# EAGLE board Microcontroller Board 1.6 (EAGLE 7.2.0)
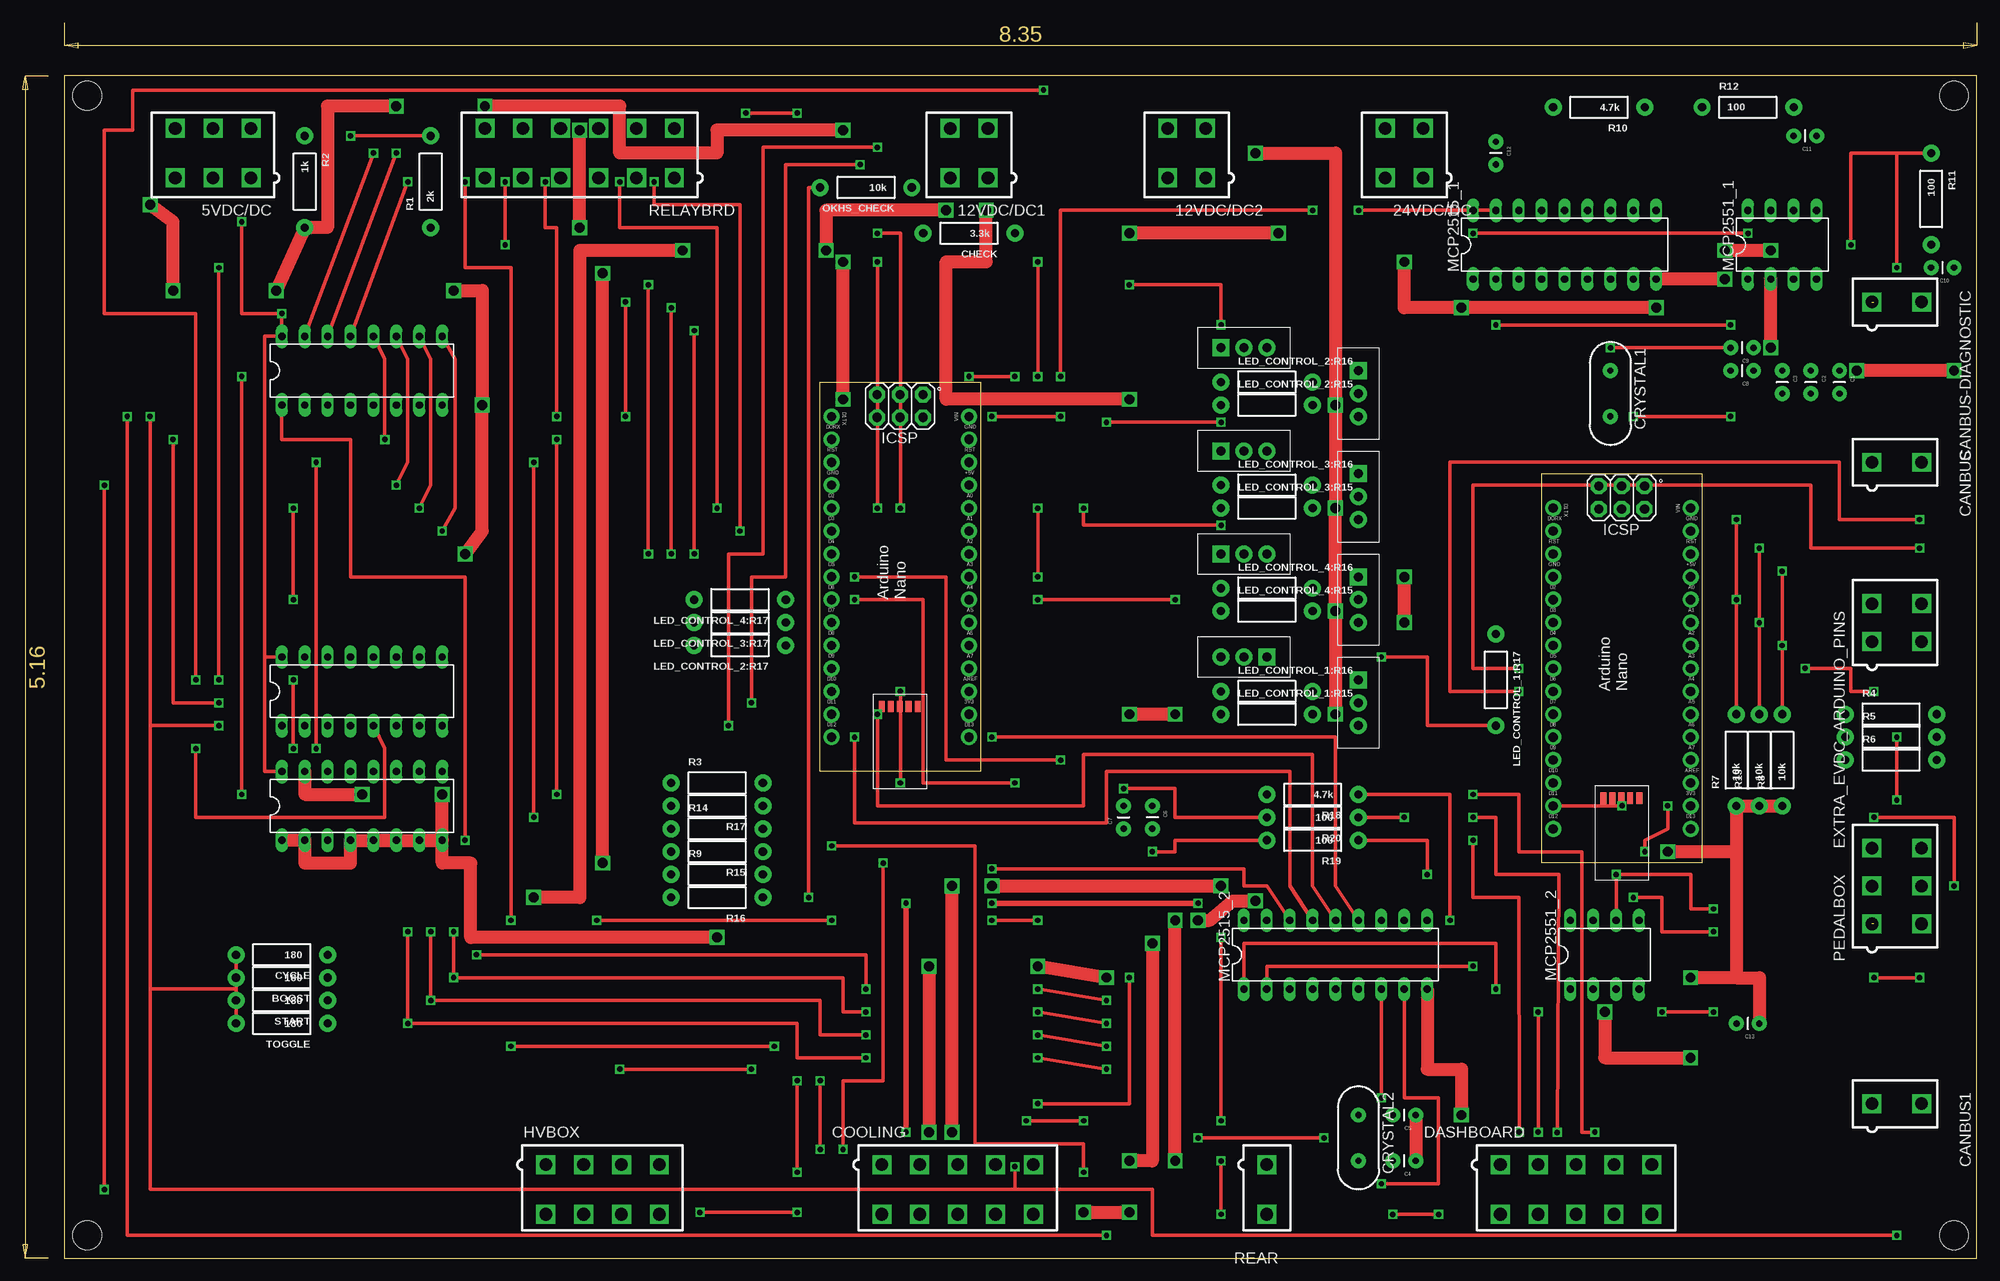
[diagram p0: board, top side]
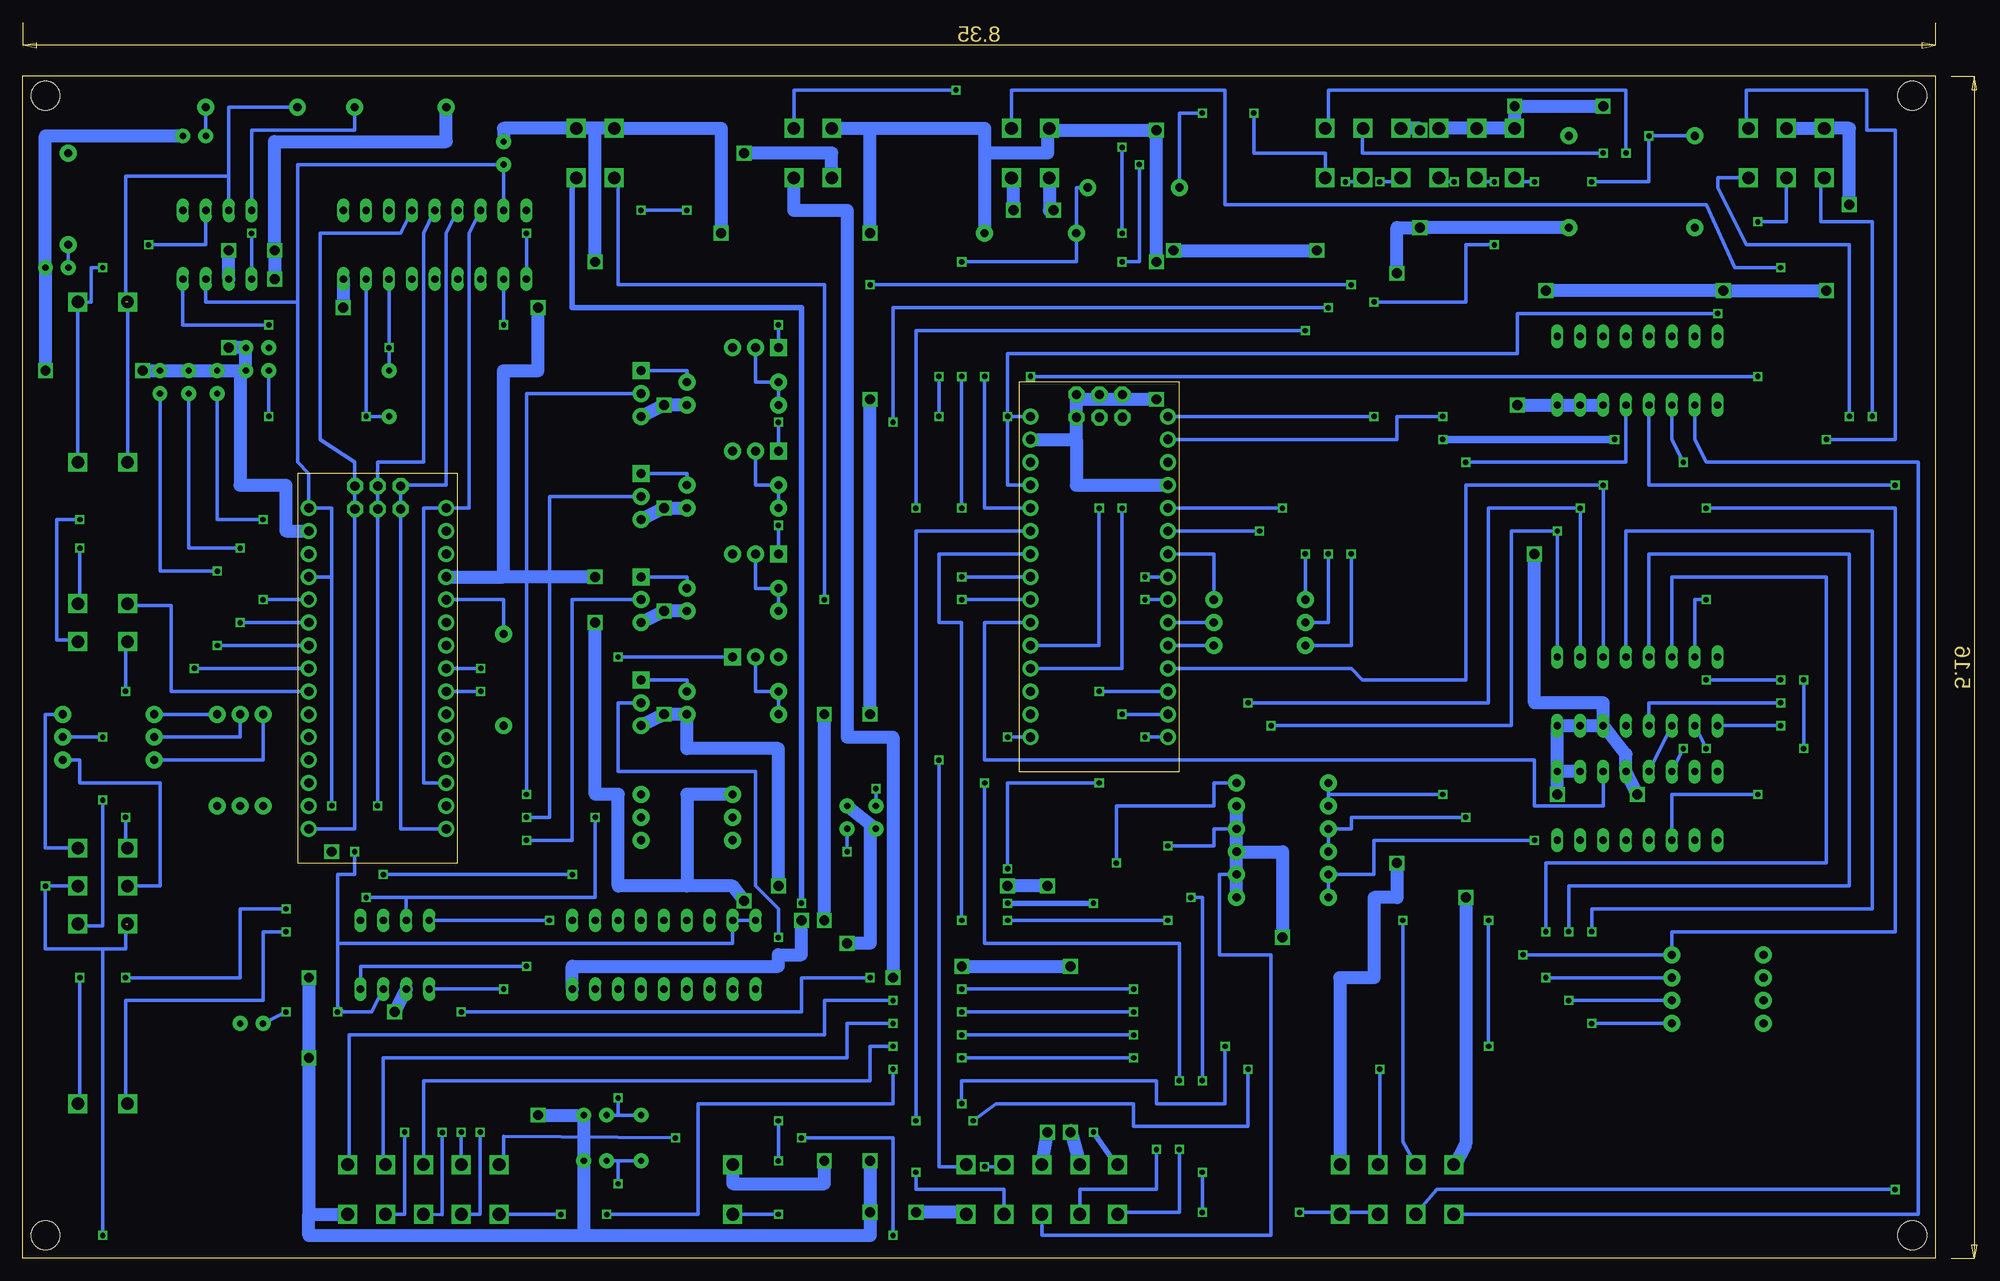
[diagram p1: board, bottom side, seen from below]

Size 212.07 x 131.12 mm. Coordinates in mm from the lower left corner, seen from the top.
Outline: 0,0 212.07,0 212.07,131.12 0,131.12 0,0
Copper layers (1*16): Top 0.035mm / dielectric 1.5mm / Bottom 0.035mm
Design rules "default": minimum track width 10mil, minimum drill 24mil, track to track 8mil, track to pad 8mil, pad to pad 8mil, via to via 8mil, smd to smd 8mil, copper to edge 40mil, drill to drill 8mil, minimum pad ring 10mil, minimum via ring 8mil, stop-mask expansion 4mil, vias tented up to drill 0mil, thermal gap 10mil
Holes 3.2 mm at 2.54,128.91 2.54,2.54 209.55,128.91 209.55,2.54

## Footprints (pad centres in the part's own frame; a part is rotated, then mirrored left to right if it is on the bottom)
5566-6 = drill 1.4 square: 1 4.2,-2.75; 2 0,-2.75; 3 -4.2,-2.75; 4 4.2,2.75; 5 0,2.75; 6 -4.2,2.75
5566-4 = drill 1.4 square: 1 2.1,-2.75; 2 -2.1,-2.75; 3 2.1,2.75; 4 -2.1,2.75
DIL16 = drill 0.813 long: 1 -8.89,-3.81; 2 -6.35,-3.81; 3 -3.81,-3.81; 4 -1.27,-3.81; 5 1.27,-3.81; 6 3.81,-3.81; 7 6.35,-3.81; 8 8.89,-3.81; 9 8.89,3.81; 10 6.35,3.81; 11 3.81,3.81; 12 1.27,3.81; 13 -1.27,3.81; 14 -3.81,3.81; 15 -6.35,3.81; 16 -8.89,3.81
AXIAL-0.4 = drill 0.9 pad 1.88: P$1 -5.08,0; P$2 5.08,0
CAP-PTH-SMALL = drill 0.7 pad 1.651: 1 0,0; 2 2.54,0
5566-2 = drill 1.4 square: 1 0,-2.75; 2 0,2.75
5566-10 = drill 1.4 square: 1 8.4,-2.75; 2 4.2,-2.75; 3 0,-2.75; 4 -4.2,-2.75; 5 -8.4,-2.75; 6 8.4,2.75; 7 4.2,2.75; 8 0,2.75; 9 -4.2,2.75; 10 -8.4,2.75
HC49US = drill 0.7 pad 1.651: 1 -2.54,0; 2 2.54,0
5566-8 = drill 1.4 square: 1 6.3,-2.75; 2 2.1,-2.75; 3 -2.1,-2.75; 4 -6.3,-2.75; 5 6.3,2.75; 6 2.1,2.75; 7 -2.1,2.75; 8 -6.3,2.75
TO-220 = drill 1 pad 1.88 square: 1 -2.54,0 | drill 1 pad 1.88: 2 0,0; 3 2.54,0
DIL18 = drill 0.813 long: 1 -10.16,-3.81; 2 -7.62,-3.81; 3 -5.08,-3.81; 4 -2.54,-3.81; 5 0,-3.81; 6 2.54,-3.81; 7 5.08,-3.81; 8 7.62,-3.81; 9 10.16,-3.81; 10 10.16,3.81; 11 7.62,3.81; 12 5.08,3.81; 13 2.54,3.81; 14 0,3.81; 15 -2.54,3.81; 16 -5.08,3.81; 17 -7.62,3.81; 18 -10.16,3.81
DIL08 = drill 0.813 long: 1 -3.81,-3.81; 2 -1.27,-3.81; 3 1.27,-3.81; 4 3.81,-3.81; 5 3.81,3.81; 6 1.27,3.81; 7 -1.27,3.81; 8 -3.81,3.81
ARDUINO_NANO = drill 1.016 pad 1.778: 3V3 6.35,1.27; 5V 31.75,1.27; A0 29.21,1.27; A1 26.67,1.27; A2 24.13,1.27; A3 21.59,1.27; A4 19.05,1.27; A5 16.51,1.27; A6 13.97,1.27; A7 11.43,1.27; D2 29.21,16.51; D3 26.67,16.51; D4 24.13,16.51; D5 21.59,16.51; D6 19.05,16.51; D7 16.51,16.51; D8 13.97,16.51; D9 11.43,16.51; D10 8.89,16.51; D11 6.35,16.51; D12 3.81,16.51; D13 3.81,1.27; GND 31.75,16.51; GND. 36.83,1.27; REF 8.89,1.27; RST 34.29,16.51; RST. 34.29,1.27; RX1 36.83,16.51; TX1 39.37,16.51; VIN 39.37,1.27 | drill 1.016 pad 1.778 octagon: 5V. 39.268,6.375; GND_ 39.268,11.455; MISO 41.808,6.375; MOSI 39.268,8.915; RESET.. 41.808,11.455; SCK 41.808,8.915 | smd 1.27 x 0.635: <USB>+V 7.214,10.947; <USB>D+ 7.214,9.957; <USB>D- 7.214,8.941; <USB>GND 7.214,6.96; <USB>ID 7.214,7.976
5566-12 = drill 1.4 square: 1 10.5,-2.75; 2 6.3,-2.75; 3 2.1,-2.75; 4 -2.1,-2.75; 5 -6.3,-2.75; 6 -10.5,-2.75; 7 10.5,2.75; 8 6.3,2.75; 9 2.1,2.75; 10 -2.1,2.75; 11 -6.3,2.75; 12 -10.5,2.75

## Placement (x,y rotation side)
5VDC/DC  5566-6  [5566-6]  16.51,122.56 0 top
12VDC/DC1  5566-4  [5566-4]  100.33,122.56 0 top
12VDC/DC2  5566-4  [5566-4]  124.46,122.56 0 top
16_CHANNEL_MULTIPLEXER:MULTIPLEXER_1  CD74HC4051E  [DIL16]  33.02,50.17 0 top
16_CHANNEL_MULTIPLEXER:MULTIPLEXER_2  CD74HC4051E  [DIL16]  33.02,62.86 0 top
16_CHANNEL_MULTIPLEXER:MULTIPLEXER_3  CD74HC4051E  [DIL16]  33.02,98.42 0 top
24VDC/DC  5566-4  [5566-4]  148.59,122.56 0 top
BOOST  180  [AXIAL-0.4]  24.13,31.11 180 top
C1  [CAP-PTH-SMALL]  196.85,98.42 270 top
C2  [CAP-PTH-SMALL]  193.68,98.42 270 top
C3  [CAP-PTH-SMALL]  190.5,98.42 270 top
C4  22pF  [CAP-PTH-SMALL]  149.86,10.79 180 top
C5  22pF  [CAP-PTH-SMALL]  149.86,15.88 180 top
C6  560pF  [CAP-PTH-SMALL]  120.65,50.17 270 top
C7  560pF  [CAP-PTH-SMALL]  117.47,47.62 90 top
C8  22pF  [CAP-PTH-SMALL]  187.32,98.42 180 top
C9  22pF  [CAP-PTH-SMALL]  187.32,100.97 180 top
C10  560pF  [CAP-PTH-SMALL]  209.55,109.86 180 top
C11  560pF  [CAP-PTH-SMALL]  194.31,124.46 180 top
C12  0.1uF  [CAP-PTH-SMALL]  158.75,123.83 270 top
C13  0.1uF  [CAP-PTH-SMALL]  187.96,26.04 180 top
CANBUS  5566-2  [5566-2]  203.2,88.27 270 top
CANBUS1  5566-2  [5566-2]  203.2,17.14 270 top
CANBUS-DIAGNOSTIC  5566-2  [5566-2]  203.2,106.05 270 top
CHECK  3.3k  [AXIAL-0.4]  100.33,113.67 180 top
COOLING  5566-10  [5566-10]  99.06,7.62 180 top
CRYSTAL1  16MHz  [HC49US]  171.45,95.89 270 top
CRYSTAL2  16MHz  [HC49US]  143.51,13.34 270 top
CYCLE  180  [AXIAL-0.4]  24.13,33.66 180 top
DASHBOARD  5566-10  [5566-10]  167.64,7.62 180 top
EXTRA_EVDC_ARDUINO_PINS  5566-4  [5566-4]  203.2,70.48 270 top
HVBOX  5566-8  [5566-8]  59.69,7.62 180 top
LED_CONTROL_1:NPN1  [TO-220]  130.81,66.67 180 top
LED_CONTROL_1:PNP1  BJT_PNP  [TO-220]  143.51,61.59 270 top
LED_CONTROL_1:R15  [AXIAL-0.4]  133.35,60.33 0 top
LED_CONTROL_1:R16  [AXIAL-0.4]  133.35,62.86 0 top
LED_CONTROL_1:R17  [AXIAL-0.4]  158.75,64.14 270 top
LED_CONTROL_2:NPN1  [TO-220]  130.81,100.97 0 top
LED_CONTROL_2:PNP1  BJT_PNP  [TO-220]  143.51,95.89 270 top
LED_CONTROL_2:R15  [AXIAL-0.4]  133.35,94.62 0 top
LED_CONTROL_2:R16  [AXIAL-0.4]  133.35,97.16 0 top
LED_CONTROL_2:R17  [AXIAL-0.4]  74.93,67.94 180 top
LED_CONTROL_3:NPN1  [TO-220]  130.81,89.53 0 top
LED_CONTROL_3:PNP1  BJT_PNP  [TO-220]  143.51,84.45 270 top
LED_CONTROL_3:R15  [AXIAL-0.4]  133.35,83.19 0 top
LED_CONTROL_3:R16  [AXIAL-0.4]  133.35,85.73 0 top
LED_CONTROL_3:R17  [AXIAL-0.4]  74.93,70.48 180 top
LED_CONTROL_4:NPN1  [TO-220]  130.81,78.11 0 top
LED_CONTROL_4:PNP1  BJT_PNP  [TO-220]  143.51,73.03 270 top
LED_CONTROL_4:R15  [AXIAL-0.4]  133.35,71.76 0 top
LED_CONTROL_4:R16  [AXIAL-0.4]  133.35,74.3 0 top
LED_CONTROL_4:R17  [AXIAL-0.4]  74.93,73.03 180 top
MCP2515_1  MCP2515  [DIL18]  166.37,112.4 0 top
MCP2515_2  MCP2515  [DIL18]  140.97,33.66 0 top
MCP2551_1  MCP2551  [DIL08]  190.5,112.4 0 top
MCP2551_2  MCP2551  [DIL08]  170.81,33.66 0 top
OKHS_CHECK  10k  [AXIAL-0.4]  88.9,118.75 180 top
PCB1  ARDUINO_NANO  [ARDUINO_NANO]  101.6,53.97 90 top
PCB2  ARDUINO_NANO  [ARDUINO_NANO]  181.61,43.81 90 top
PEDALBOX  5566-6  [5566-6]  203.2,41.28 270 top
R1  2k  [AXIAL-0.4]  40.64,119.38 90 top
R2  1k  [AXIAL-0.4]  26.67,119.38 270 top
R3  [AXIAL-0.4]  72.39,52.7 0 top
R4  [AXIAL-0.4]  202.56,60.33 0 top
R5  [AXIAL-0.4]  202.56,57.78 0 top
R6  [AXIAL-0.4]  202.56,55.25 0 top
R7  10k  [AXIAL-0.4]  185.42,55.25 90 top
R8  10k  [AXIAL-0.4]  190.5,55.25 90 top
R9  [AXIAL-0.4]  72.39,42.55 0 top
R10  4.7k  [AXIAL-0.4]  170.18,127.64 180 top
R11  100  [AXIAL-0.4]  207.01,117.48 270 top
R12  100  [AXIAL-0.4]  186.69,127.64 0 top
R13  10k  [AXIAL-0.4]  187.96,55.25 90 top
R14  [AXIAL-0.4]  72.39,47.62 0 top
R15  [AXIAL-0.4]  72.39,45.08 180 top
R16  [AXIAL-0.4]  72.39,40 180 top
R17  [AXIAL-0.4]  72.39,50.17 180 top
R18  4.7k  [AXIAL-0.4]  138.43,51.44 180 top
R19  100  [AXIAL-0.4]  138.43,46.36 180 top
R20  100  [AXIAL-0.4]  138.43,48.89 180 top
REAR  5566-2  [5566-2]  133.35,7.62 180 top
RELAYBRD  5566-12  [5566-12]  57.15,122.56 0 top
START  180  [AXIAL-0.4]  24.13,28.57 180 top
TOGGLE  180  [AXIAL-0.4]  24.13,26.04 180 top

## Library data of the parts
5VDC/DC PEDALBOX = con-molex; MPN: 95566-61002; OC_FARNELL: unknown; OC_NEWARK: 22K8620
12VDC/DC1 12VDC/DC2 24VDC/DC COOLING DASHBOARD EXTRA_EVDC_ARDUINO_PINS HVBOX RELAYBRD = con-molex; OC_FARNELL: unknown; OC_NEWARK: unknown
16_CHANNEL_MULTIPLEXER:MULTIPLEXER_1-16_CHANNEL_MULTIPLEXER:MULTIPLEXER_3 R1-R3 R9 R14-R17 = HyTech 2016-2-21-2016
BOOST CHECK CYCLE OKHS_CHECK START TOGGLE = HyTech 2016
C1-C13 MCP2515_1 MCP2515_2 MCP2551_1 MCP2551_2 R4-R8 R10-R13 R18-R20 = HyTech 2016-10-27-2015
CANBUS CANBUS1 CANBUS-DIAGNOSTIC REAR = con-molex; OC_FARNELL: 1822072; OC_NEWARK: unknown
CRYSTAL1 CRYSTAL2 = SparkFun-FreqCtrl
LED_CONTROL_1:NPN1 LED_CONTROL_1:PNP1 LED_CONTROL_2:NPN1 LED_CONTROL_2:PNP1 LED_CONTROL_3:NPN1 LED_CONTROL_3:PNP1 LED_CONTROL_4:NPN1 LED_CONTROL_4:PNP1 = HyTech 2016-2-27-2016
LED_CONTROL_1:R15-LED_CONTROL_1:R17 LED_CONTROL_2:R15-LED_CONTROL_2:R17 LED_CONTROL_3:R15-LED_CONTROL_3:R17 LED_CONTROL_4:R15-LED_CONTROL_4:R17 = HyTech 2016-11-02-2015-6-51pm
PCB1 PCB2 = E14_Arduino_revB

## Nets
5VDC/DC_THERMISTOR: 5VDC/DC.4 16_CHANNEL_MULTIPLEXER:MULTIPLEXER_2.4
5VSUPPLY1: 5VDC/DC.1 16_CHANNEL_MULTIPLEXER:MULTIPLEXER_2.1 BOOST.P$2 COOLING.4 CYCLE.P$2 PEDALBOX.1 PEDALBOX.3 PEDALBOX.5 START.P$2 TOGGLE.P$2
5VSUPPLY2: 5VDC/DC.2 16_CHANNEL_MULTIPLEXER:MULTIPLEXER_1.16 16_CHANNEL_MULTIPLEXER:MULTIPLEXER_2.16 16_CHANNEL_MULTIPLEXER:MULTIPLEXER_3.16 C12.2 C13.2 MCP2515_1.17 MCP2515_1.18 MCP2515_2.17 MCP2515_2.18 MCP2551_1.3 MCP2551_2.3 PCB1.5V PCB1.VIN PCB2.5V PCB2.VIN
5VSUPPLY3: 5VDC/DC.3 DASHBOARD.1
12VDC/DC1_THERMISTOR: 12VDC/DC1.3 16_CHANNEL_MULTIPLEXER:MULTIPLEXER_2.2
12VDC/DC2_THERMISTOR: 12VDC/DC2.3 16_CHANNEL_MULTIPLEXER:MULTIPLEXER_2.5
12VSUPPLY1: 12VDC/DC1.1 REAR.1
12VSUPPLY2: 12VDC/DC1.2 HVBOX.1
12VSUPPLY3: 12VDC/DC2.1 COOLING.2
12VSUPPLY4: 12VDC/DC2.2 COOLING.3 LED_CONTROL_1:PNP1.3 LED_CONTROL_1:R15.P$2 LED_CONTROL_2:PNP1.3 LED_CONTROL_2:R15.P$2 LED_CONTROL_3:PNP1.3 LED_CONTROL_3:R15.P$2 LED_CONTROL_4:PNP1.3 LED_CONTROL_4:R15.P$2
16_CHANNEL_MULTIPLEXER:N$2: 16_CHANNEL_MULTIPLEXER:MULTIPLEXER_1.14 16_CHANNEL_MULTIPLEXER:MULTIPLEXER_3.3
16_CHANNEL_MULTIPLEXER:N$4: 16_CHANNEL_MULTIPLEXER:MULTIPLEXER_1.13 16_CHANNEL_MULTIPLEXER:MULTIPLEXER_2.3
24VDC/DC_THERMISTOR: 24VDC/DC.2 PCB1.A4
24VSUPPLY: 24VDC/DC.1 COOLING.1
A_SIGNAL: PEDALBOX.2 R6.P$2
A_SIGNAL_FILTERED: C3.2 PCB2.A0 R6.P$1 R7.P$2
AIR_UNREGULATED_DIVIDER: 16_CHANNEL_MULTIPLEXER:MULTIPLEXER_3.15 RELAYBRD.7
B_SIGNAL: PEDALBOX.4 R5.P$2
B_SIGNAL_FILTERED: C2.2 PCB2.A1 R5.P$1 R13.P$2
BMS_FAULT_LED: DASHBOARD.9 LED_CONTROL_2:PNP1.2
BMS_FAULT_LED_CTRL: LED_CONTROL_2:R17.P$1 PCB1.D8
BRAKE_LIGHT_LED: LED_CONTROL_1:PNP1.2 REAR.2
BRAKE_LIGHT_LED_CTRL: LED_CONTROL_1:R17.P$1 PCB2.D2
BTN_BOOST: 16_CHANNEL_MULTIPLEXER:MULTIPLEXER_2.14 BOOST.P$1 DASHBOARD.4
BTN_CYCLE: 16_CHANNEL_MULTIPLEXER:MULTIPLEXER_2.15 CYCLE.P$1 DASHBOARD.5
BTN_START: 16_CHANNEL_MULTIPLEXER:MULTIPLEXER_2.13 DASHBOARD.3 START.P$1
BTN_TOGGLE: 16_CHANNEL_MULTIPLEXER:MULTIPLEXER_2.12 DASHBOARD.6 TOGGLE.P$1
C_SIGNAL: PEDALBOX.6 R4.P$2
C_SIGNAL_FILTERED: C1.2 PCB2.A2 R4.P$1 R8.P$2
CAN-H_1: CANBUS-DIAGNOSTIC.1 CANBUS.1 MCP2551_1.7 R12.P$1
CAN-H_2: CANBUS1.1 MCP2551_2.7 R20.P$1
CAN-L_1: CANBUS-DIAGNOSTIC.2 CANBUS.2 MCP2551_1.6 R11.P$1
CAN-L_2: CANBUS1.2 MCP2551_2.6 R19.P$1
CONTROL_10: HVBOX.2 PCB1.A2
CONTROL_11: HVBOX.3 PCB1.A1
COOLING_SENSOR_1: 16_CHANNEL_MULTIPLEXER:MULTIPLEXER_3.12 R3.P$1 R17.P$2
COOLING_SENSOR_2: 16_CHANNEL_MULTIPLEXER:MULTIPLEXER_3.1 R9.P$1 R16.P$2
COOLING_SENSOR_3: 16_CHANNEL_MULTIPLEXER:MULTIPLEXER_3.5 R14.P$1 R15.P$2
EVDC_ANALOG_1: EXTRA_EVDC_ARDUINO_PINS.1 PCB2.A3
EVDC_ANALOG_2: EXTRA_EVDC_ARDUINO_PINS.2 PCB2.A4
EVDC_DIGITAL_1: EXTRA_EVDC_ARDUINO_PINS.3 PCB2.D6
EVDC_DIGITAL_2: EXTRA_EVDC_ARDUINO_PINS.4 PCB2.D5
FAN_CTRL: COOLING.5 PCB1.D5
GND: 5VDC/DC.5 5VDC/DC.6 12VDC/DC1.4 12VDC/DC2.4 16_CHANNEL_MULTIPLEXER:MULTIPLEXER_1.1 16_CHANNEL_MULTIPLEXER:MULTIPLEXER_1.2 16_CHANNEL_MULTIPLEXER:MULTIPLEXER_1.4 16_CHANNEL_MULTIPLEXER:MULTIPLEXER_1.5 16_CHANNEL_MULTIPLEXER:MULTIPLEXER_1.6 16_CHANNEL_MULTIPLEXER:MULTIPLEXER_1.7 16_CHANNEL_MULTIPLEXER:MULTIPLEXER_1.8 16_CHANNEL_MULTIPLEXER:MULTIPLEXER_1.9 16_CHANNEL_MULTIPLEXER:MULTIPLEXER_1.10 16_CHANNEL_MULTIPLEXER:MULTIPLEXER_1.12 16_CHANNEL_MULTIPLEXER:MULTIPLEXER_1.15 16_CHANNEL_MULTIPLEXER:MULTIPLEXER_2.6 16_CHANNEL_MULTIPLEXER:MULTIPLEXER_2.7 16_CHANNEL_MULTIPLEXER:MULTIPLEXER_2.8 16_CHANNEL_MULTIPLEXER:MULTIPLEXER_3.6 16_CHANNEL_MULTIPLEXER:MULTIPLEXER_3.7 16_CHANNEL_MULTIPLEXER:MULTIPLEXER_3.8 24VDC/DC.3 24VDC/DC.4 C1.1 C2.1 C3.1 C4.1 C5.1 C6.1 C7.1 C8.1 C9.1 C10.1 C11.1 C12.1 C13.1 CHECK.P$1 COOLING.10 DASHBOARD.10 MCP2515_1.9 MCP2515_2.9 MCP2551_1.2 MCP2551_2.2 PCB1.GND PCB1.GND. PCB2.GND PCB2.GND. R2.P$2 R7.P$1 R8.P$1 R10.P$2 R13.P$1 R15.P$1 R16.P$1 R17.P$1 R18.P$2 RELAYBRD.10 RELAYBRD.11 RELAYBRD.12
IMD_FAULT_LED: DASHBOARD.8 LED_CONTROL_3:PNP1.2
IMD_FAULT_LED_CTRL: LED_CONTROL_3:R17.P$1 PCB1.D7
LED_CONTROL_1:GND: LED_CONTROL_1:NPN1.3
LED_CONTROL_1:N$24: LED_CONTROL_1:NPN1.1 LED_CONTROL_1:R17.P$2
LED_CONTROL_1:N$25: LED_CONTROL_1:NPN1.2 LED_CONTROL_1:R15.P$1 LED_CONTROL_1:R16.P$1
LED_CONTROL_1:N$27: LED_CONTROL_1:PNP1.1 LED_CONTROL_1:R16.P$2
LED_CONTROL_2:GND: LED_CONTROL_2:NPN1.3
LED_CONTROL_2:N$24: LED_CONTROL_2:NPN1.1 LED_CONTROL_2:R17.P$2
LED_CONTROL_2:N$25: LED_CONTROL_2:NPN1.2 LED_CONTROL_2:R15.P$1 LED_CONTROL_2:R16.P$1
LED_CONTROL_2:N$27: LED_CONTROL_2:PNP1.1 LED_CONTROL_2:R16.P$2
LED_CONTROL_3:GND: LED_CONTROL_3:NPN1.3
LED_CONTROL_3:N$24: LED_CONTROL_3:NPN1.1 LED_CONTROL_3:R17.P$2
LED_CONTROL_3:N$25: LED_CONTROL_3:NPN1.2 LED_CONTROL_3:R15.P$1 LED_CONTROL_3:R16.P$1
LED_CONTROL_3:N$27: LED_CONTROL_3:PNP1.1 LED_CONTROL_3:R16.P$2
LED_CONTROL_4:GND: LED_CONTROL_4:NPN1.3
LED_CONTROL_4:N$24: LED_CONTROL_4:NPN1.1 LED_CONTROL_4:R17.P$2
LED_CONTROL_4:N$25: LED_CONTROL_4:NPN1.2 LED_CONTROL_4:R15.P$1 LED_CONTROL_4:R16.P$1
LED_CONTROL_4:N$27: LED_CONTROL_4:PNP1.1 LED_CONTROL_4:R16.P$2
MCP2515-MISO_1: MCP2515_1.15 PCB2.D12
MCP2515-MISO_2: MCP2515_2.15 PCB1.D12
MCP2515-MOSI_1: MCP2515_1.14 PCB2.D11
MCP2515-MOSI_2: MCP2515_2.14 PCB1.D11
MCP2515-SCK_1: MCP2515_1.13 PCB2.D13
MCP2515-SCK_2: MCP2515_2.13 PCB1.D13
MCP2515-SS_1: MCP2515_1.16 PCB2.D10
MCP2515-SS_2: MCP2515_2.16 PCB1.D10
N$1: 16_CHANNEL_MULTIPLEXER:MULTIPLEXER_1.3 PCB1.A0
N$2: COOLING.7 R3.P$2
N$3: COOLING.8 R9.P$2
N$4: COOLING.9 R14.P$2
N$5: MCP2515_2.1 MCP2551_2.1
N$6: MCP2515_2.2 MCP2551_2.4
N$7: C4.2 CRYSTAL2.2 MCP2515_2.8
N$8: 16_CHANNEL_MULTIPLEXER:MULTIPLEXER_1.11 PCB1.A5
N$9: 16_CHANNEL_MULTIPLEXER:MULTIPLEXER_2.11 16_CHANNEL_MULTIPLEXER:MULTIPLEXER_3.11 PCB1.D9
N$10: C8.2 CRYSTAL1.2 MCP2515_1.8
N$12: MCP2515_1.1 MCP2551_1.1
N$13: MCP2515_1.2 MCP2551_1.4
N$14: C11.2 R12.P$2
N$15: C9.2 CRYSTAL1.1 MCP2515_1.7
N$16: MCP2551_1.8 R10.P$1
N$17: C10.2 R11.P$2
N$19: CHECK.P$2 OKHS_CHECK.P$1 PCB1.A3
N$20: MCP2551_2.8 R18.P$1
N$21: C5.2 CRYSTAL2.1 MCP2515_2.7
N$22: C7.2 R20.P$2
N$23: C6.2 R19.P$2
N$24: 16_CHANNEL_MULTIPLEXER:MULTIPLEXER_2.9 16_CHANNEL_MULTIPLEXER:MULTIPLEXER_3.9 PCB1.A6
N$25: 16_CHANNEL_MULTIPLEXER:MULTIPLEXER_2.10 16_CHANNEL_MULTIPLEXER:MULTIPLEXER_3.10 PCB1.A7
OKHS_IN: HVBOX.7 OKHS_CHECK.P$2 RELAYBRD.1
PUMP_CTRL: COOLING.6 PCB1.D6
PWM_HIGH: 16_CHANNEL_MULTIPLEXER:MULTIPLEXER_3.4 HVBOX.6
PWM_LOW: 16_CHANNEL_MULTIPLEXER:MULTIPLEXER_3.2 HVBOX.5
READY_DRIVE_CTRL: PCB1.RX1 RELAYBRD.4
READY_SOUND: DASHBOARD.2 RELAYBRD.6
RELAYBRD_THERMISTOR: 16_CHANNEL_MULTIPLEXER:MULTIPLEXER_3.14 RELAYBRD.8
SOFTWARE_DC/DC_CTRL: PCB1.TX1 RELAYBRD.5
SOFTWARE_PUSHBUTTON_CTRL: PCB1.D3 RELAYBRD.2
SOFTWARE_SHUTDOWN_CTRL: PCB1.D2 RELAYBRD.3
START_LED: DASHBOARD.7 LED_CONTROL_4:PNP1.2
START_LED_CTRL: LED_CONTROL_4:R17.P$1 PCB1.D4
VCC_AIR_DIVIDER: 16_CHANNEL_MULTIPLEXER:MULTIPLEXER_3.13 R1.P$2 R2.P$1
VCCAIR: HVBOX.4 R1.P$1 RELAYBRD.9

## Tracks (layer width: path | path; a pad name or v marks a point on that pad's centre or on a via)
5VDC/DC_THERMISTOR  (via drill 0.6)
  Top 0.406: v17.15,61.59 12.07,61.59 v12.07,90.81
  Bottom 0.406: 5VDC/DC.4 20.95,125.31 20.95,129.54 7.62,129.54 7.62,125.09 4.45,125.09 4.45,90.81 v12.07,90.81 | v17.15,61.59 31.75,61.59 16_CHANNEL_MULTIPLEXER:MULTIPLEXER_2.4
5VSUPPLY1  (via drill 0.6)  (1 unrouted)
  Top 0.406: 105.41,7.62 9.53,7.62 9.53,29.84 | v105.41,10.16 105.41,7.62 | 105.41,7.62 120.65,7.62 120.65,2.54 v203.2,2.54 | v209.55,41.28 209.55,48.89 v200.66,48.89 | 9.53,29.84 9.53,59.06 | 9.53,59.06 v9.53,93.34 | CYCLE.P$2 BOOST.P$2 19.05,29.84 | 19.05,29.84 START.P$2 TOGGLE.P$2 | 19.05,29.84 9.53,29.84 | v17.15,59.06 9.53,59.06
  Bottom 0.406: COOLING.4 103.5,10.37 103.5,10.16 v105.41,10.16 | v203.2,2.54 203.2,34.29 | 200.66,37.08 200.66,34.29 203.2,34.29 | 203.2,34.29 209.55,34.29 v209.55,41.28 PEDALBOX.5 | v200.66,48.89 200.66,45.47 PEDALBOX.3 | 16_CHANNEL_MULTIPLEXER:MULTIPLEXER_2.1 v17.15,59.06 | 5VDC/DC.1 24.13,119.81 24.13,118.75 20.95,112.4 9.53,112.4 v9.53,93.34
5VSUPPLY2  (via drill 0.6)
  Top 0.406: v19.69,114.94 19.69,104.78 v24.13,104.78 16_CHANNEL_MULTIPLEXER:MULTIPLEXER_3.16 22.23,102.23 22.23,66.67 | v102.87,93.34 v110.49,93.34 | v110.49,97.79 110.49,116.2 v138.43,116.2 | v143.51,116.2 MCP2515_1.18 MCP2515_1.17 | 16_CHANNEL_MULTIPLEXER:MULTIPLEXER_2.16 22.23,66.67 | 22.23,66.67 22.23,53.97 16_CHANNEL_MULTIPLEXER:MULTIPLEXER_1.16 | v177.8,50.17 177.8,47.62 175.26,46.36 v175.26,45.08 | v177.17,27.3 v182.88,27.3
  Bottom 0.406: 5VDC/DC.2 16.51,114.94 v19.69,114.94 | v102.87,93.34 102.87,100.33 46.36,100.33 46.36,104.78 v24.13,104.78 | PCB1.VIN v102.87,93.34 | v102.87,93.34 102.87,85.73 PCB1.5V | v110.49,93.34 v110.49,97.79 | v138.43,116.2 v143.51,116.2 | MCP2515_1.17 C12.2 181.61,121.28 181.61,106.05 | MCP2551_1.3 191.77,106.05 181.61,106.05 | 181.61,106.05 181.61,88.27 180.34,87 PCB2.VIN 177.8,83.19 177.8,75.56 | 177.8,75.56 PCB2.5V | 177.8,75.56 v177.8,50.17 | MCP2551_2.3 173.36,27.3 176.53,27.3 | 176.53,27.3 v177.17,27.3 177.17,27.94 | 176.53,27.3 177.17,27.94 | 177.17,27.94 177.17,34.92 | v175.26,45.08 175.26,42.55 177.17,42.55 177.17,34.92 | 177.17,34.92 133.35,34.92 MCP2515_2.17 MCP2515_2.18 | v182.88,27.3 C13.2
5VSUPPLY3  (via drill 0.6)
  Top 0.406: v6.99,93.34 6.99,2.54 v115.57,2.54 | v125.73,13.34 v139.7,13.34
  Bottom 0.406: 5VDC/DC.3 12.31,120.02 12.7,120.02 12.7,114.94 6.99,114.94 v6.99,93.34 | v139.7,13.34 158.75,13.54 158.75,10.79 DASHBOARD.1 | v115.57,2.54 115.57,13.34 v125.73,13.34
12VDC/DC1_THERMISTOR  (via drill 0.6)
  Top 0.406: v17.15,109.86 v17.15,64.14 | v25.4,64.14 v25.4,56.52
  Bottom 0.406: v17.15,109.86 22.23,109.86 25.4,116.84 78.74,116.84 78.74,129.54 102.43,129.54 12VDC/DC1.3 | v17.15,64.14 v25.4,64.14 | v25.4,56.52 16_CHANNEL_MULTIPLEXER:MULTIPLEXER_2.2
12VDC/DC2_THERMISTOR  (via drill 0.6)
  Top 0.406: v14.61,64.14 14.61,104.78 4.45,104.78 4.45,125.09 7.62,125.09 7.62,129.54 v108.58,129.54 | v14.61,56.52 14.61,48.89 35.56,48.89 35.56,56.52 16_CHANNEL_MULTIPLEXER:MULTIPLEXER_2.5
  Bottom 0.406: v14.61,64.14 v14.61,56.52 | v108.58,129.54 126.56,129.54 12VDC/DC2.3
12VSUPPLY1  (via drill 1.1)
  Top 1.422: v123.19,10.79 v123.19,37.47 | v123.19,60.33 v118.11,60.33 | v118.11,95.25 97.79,95.25 97.79,110.49 102.23,110.49 v102.23,116.2
  Bottom 0.406: REAR.1 133.35,10.16
  Bottom 1.422: REAR.1 133.35,8.25 123.19,8.25 v123.19,10.79 | v123.19,37.47 v123.19,60.33 | v118.11,60.33 v118.11,95.25 | v102.23,116.2 102.23,119.81 12VDC/DC1.1
12VSUPPLY2  (via drill 1.1)
  Top 1.422: v97.79,116.2 84.45,116.2 v84.45,111.76 | v68.58,111.76 57.15,111.76 57.15,40 v52.07,40
  Bottom 1.422: 12VDC/DC1.2 98.23,116.2 v97.79,116.2 | v84.45,111.76 v68.58,111.76 | HVBOX.1 53.39,10.16 52.07,12.7 v52.07,40
12VSUPPLY3  (via drill 1.1)
  Top 1.422: v115.57,31.11 v107.95,32.39 | v95.89,32.39 v95.89,13.97
  Bottom 0.406: v95.89,13.97 95.89,14.18
  Bottom 1.422: v115.57,31.11 115.57,57.78 120.65,57.78 120.65,116.2 126.56,116.2 12VDC/DC2.1 | v107.95,32.39 v95.89,32.39 | 95.89,14.18 COOLING.2
12VSUPPLY4  (via drill 1.1)
  Top 1.422: v132.08,122.56 140.97,122.56 v140.97,94.62 v140.97,83.19 v140.97,71.76 v140.97,60.33 | v98.42,13.97 v98.42,41.28 | v102.87,41.28 v128.27,41.28
  Bottom 1.422: LED_CONTROL_2:PNP1.3 v140.97,94.62 LED_CONTROL_2:R15.P$2 | LED_CONTROL_3:PNP1.3 v140.97,83.19 LED_CONTROL_3:R15.P$2 | LED_CONTROL_4:R15.P$2 v140.97,71.76 LED_CONTROL_4:PNP1.3 | 12VDC/DC2.2 122.36,122.56 v132.08,122.56 | LED_CONTROL_1:PNP1.3 v140.97,60.33 LED_CONTROL_1:R15.P$2 138.43,56.52 128.27,56.52 v128.27,41.28 | COOLING.3 v98.42,13.97 | v98.42,41.28 v102.87,41.28
16_CHANNEL_MULTIPLEXER:N$2  (via drill 0.6)
  Top 0.406: v27.94,88.27 v27.94,56.52
  Bottom 0.406: 16_CHANNEL_MULTIPLEXER:MULTIPLEXER_3.3 29.21,90.81 v27.94,88.27 | v27.94,56.52 16_CHANNEL_MULTIPLEXER:MULTIPLEXER_1.14
16_CHANNEL_MULTIPLEXER:N$4
  Bottom 0.406: 16_CHANNEL_MULTIPLEXER:MULTIPLEXER_1.13 16_CHANNEL_MULTIPLEXER:MULTIPLEXER_2.3
24VDC/DC_THERMISTOR  (via drill 0.6)
  Top 0.406: v107.95,73.03 v123.19,73.03
  Bottom 0.406: v123.19,73.03 123.19,107.95 146.05,107.95 146.05,119.76 146.05,119.81 24VDC/DC.2 | v107.95,73.03 PCB1.A4
24VSUPPLY  (via drill 0.6)
  Top 0.61: v93.34,13.97 v93.34,39.37 | v102.87,39.37 v125.73,39.37
  Bottom 0.61: COOLING.1 90.66,10.16 v93.34,13.97 | v93.34,39.37 v102.87,39.37 | v125.73,39.37 125.73,105.41 151.13,105.41 151.13,119.81 24VDC/DC.1
A_SIGNAL
  Bottom 0.406: R6.P$2 205.74,55.25 205.74,52.7 196.85,52.7 196.85,41.28 PEDALBOX.2
A_SIGNAL_FILTERED  (via drill 0.6)
  Top 0.406: v185.42,81.92 v185.42,73.03 R7.P$2
  Bottom 0.406: C3.2 190.5,81.92 v185.42,81.92 | PCB2.A0 v185.42,73.03 | R6.P$1 185.42,55.25 R7.P$2
AIR_UNREGULATED_DIVIDER  (via drill 0.6)
  Top 0.406: v34.29,122.56 16_CHANNEL_MULTIPLEXER:MULTIPLEXER_3.15
  Bottom 0.406: v34.29,122.56 34.29,129.54 67.31,129.54 67.31,125.31 RELAYBRD.7
B_SIGNAL  (via drill 0.6)
  Top 0.406: v203.2,57.78 v203.2,50.8
  Bottom 0.406: R5.P$2 v203.2,57.78 | PEDALBOX.4 205.74,37.08 205.74,36.83 203.2,36.83 v203.2,50.8
B_SIGNAL_FILTERED  (via drill 0.6)
  Top 0.406: v187.96,78.74 v187.96,70.48 R13.P$2
  Bottom 0.406: R5.P$1 187.96,57.78 R13.P$2 | C2.2 193.68,78.74 v187.96,78.74 | v187.96,70.48 PCB2.A1
BMS_FAULT_LED  (via drill 0.6)
  Top 0.406: v169.72,13.97 168.27,13.97 168.27,45.08 161.29,45.08 161.29,51.44 v156.21,51.44
  Bottom 0.406: LED_CONTROL_2:PNP1.2 156.21,95.89 v156.21,51.44 | v169.72,13.97 169.72,4.87 DASHBOARD.9
BMS_FAULT_LED_CTRL
  Bottom 0.406: LED_CONTROL_2:R17.P$1 PCB1.D8
BRAKE_LIGHT_LED  (via drill 0.6)
  Top 0.406: v128.27,35.56 v128.27,15.24 | v128.27,10.79 v128.27,4.87
  Bottom 0.406: LED_CONTROL_1:PNP1.2 146.05,61.59 146.05,53.97 130.81,53.97 130.81,41.28 128.27,38.73 v128.27,35.56 | v128.27,15.24 v128.27,10.79 | v128.27,4.87 REAR.2
BRAKE_LIGHT_LED_CTRL
  Bottom 0.406: LED_CONTROL_1:R17.P$1 158.75,73.03 PCB2.D2
BTN_BOOST  (via drill 0.6)
  Top 0.406: v88.9,27.3 86.36,27.3 86.36,31.11 v43.18,31.11 v43.18,36.2 | v107.95,27.3 v115.57,26.04
  Bottom 0.406: v43.18,31.11 BOOST.P$1 | v88.9,27.3 v107.95,27.3 | v115.57,26.04 120.65,26.04 120.65,22.23 172.08,22.23 172.08,10.37 DASHBOARD.4 | v43.18,36.2 43.18,43.81 12.07,43.81 12.07,75.56 29.21,75.56 16_CHANNEL_MULTIPLEXER:MULTIPLEXER_2.14
BTN_CYCLE  (via drill 0.6)
  Top 0.406: v45.72,33.66 88.9,33.66 v88.9,29.84 | v107.95,29.84 v115.57,28.57 | v25.4,83.19 v25.4,73.03
  Bottom 0.406: v88.9,29.84 v107.95,29.84 | v115.57,28.57 123.19,28.57 123.19,24.77 175.89,24.77 175.89,10.37 DASHBOARD.5 | v45.72,33.66 CYCLE.P$1 29.21,36.2 4.45,36.2 4.45,83.19 v25.4,83.19 | v25.4,73.03 26.67,73.03 16_CHANNEL_MULTIPLEXER:MULTIPLEXER_2.15
BTN_START  (via drill 0.6)
  Top 0.406: v88.9,24.77 83.82,24.77 83.82,28.57 v40.64,28.57 v40.64,36.2 | v107.95,24.77 v115.57,23.5
  Bottom 0.406: v40.64,28.57 START.P$1 | v88.9,24.77 v107.95,24.77 | v115.57,23.5 118.11,23.5 118.11,19.69 167.64,19.69 DASHBOARD.3 | v40.64,36.2 40.64,41.28 9.53,41.28 9.53,78.11 31.75,78.11 16_CHANNEL_MULTIPLEXER:MULTIPLEXER_2.13
BTN_TOGGLE  (via drill 0.6)
  Top 0.406: v88.9,22.23 81.28,22.23 81.28,26.04 v38.1,26.04 v38.1,36.2 | v107.95,22.23 v115.57,20.95 | v147.32,4.85 v152.4,4.85
  Bottom 0.406: v38.1,26.04 TOGGLE.P$1 | v88.9,22.23 v107.95,22.23 | v115.57,20.95 115.57,17.14 137.16,17.14 137.16,4.87 147.32,4.87 v147.32,4.85 | v38.1,36.2 38.1,38.73 6.99,38.73 6.99,80.65 34.29,80.65 16_CHANNEL_MULTIPLEXER:MULTIPLEXER_2.12 | v152.4,4.85 DASHBOARD.6
C_SIGNAL
  Bottom 0.406: R4.P$2 209.55,60.33 209.55,45.47 PEDALBOX.6
C_SIGNAL_FILTERED  (via drill 0.6)
  Top 0.406: v190.5,76.2 v190.5,67.94 R8.P$2
  Bottom 0.406: v190.5,67.94 PCB2.A2 | C1.2 196.85,76.2 v190.5,76.2 | R8.P$2 R4.P$1
CAN-H_1  (1 unrouted)
  Bottom 0.406: MCP2551_1.7 189.23,120.02 | 189.23,120.02 200.66,120.02 200.66,106.05 | R12.P$1 189.23,127.64 189.23,120.02 | CANBUS.1 CANBUS-DIAGNOSTIC.1
CAN-H_2  (via drill 0.6)
  Top 0.406: v182.88,36.2 177.17,36.2 177.17,40 v173.99,40 | v148.59,48.89 R20.P$1
  Bottom 0.406: MCP2551_2.7 169.55,40 | 169.55,40 148.59,40 v148.59,48.89 | v182.88,36.2 185.42,36.2 185.42,28.57 200.66,28.57 200.66,17.14 CANBUS1.1 | 169.55,40 v173.99,40
CAN-L_1  (via drill 0.6)
  Top 0.406: v198.12,112.4 198.12,122.56 203.2,122.56 | 203.2,122.56 v203.2,109.86 | R11.P$1 203.2,122.56
  Bottom 0.406: CANBUS.2 CANBUS-DIAGNOSTIC.2 204.47,106.05 204.47,109.86 v203.2,109.86 | MCP2551_1.6 191.77,112.4 v198.12,112.4
CAN-L_2  (via drill 0.6)
  Top 0.406: v151.13,42.55 151.13,46.36 R19.P$1 | v182.88,38.73 180.34,38.73 180.34,42.55 v172.08,42.55 MCP2551_2.6 | v200.66,31.11 v205.74,31.11
  Bottom 0.406: v172.08,42.55 v151.13,42.55 | v182.88,38.73 187.96,38.73 187.96,31.11 v200.66,31.11 | v205.74,31.11 205.74,17.14 CANBUS1.2
CONTROL_10  (via drill 0.6)
  Top 0.406: v107.95,37.47 v102.87,37.47 | v59.05,37.47 v85.09,37.47
  Bottom 0.406: PCB1.A2 110.49,78.11 110.49,70.48 107.95,70.48 v107.95,37.47 | v102.87,37.47 v85.09,37.47 | v59.05,37.47 59.05,12.91 HVBOX.2
CONTROL_11  (via drill 0.6)
  Top 0.406: v61.59,20.95 v76.2,20.95 | v106.68,15.24 v113.03,15.24
  Bottom 0.406: PCB1.A1 113.03,80.65 113.03,17.14 v113.03,15.24 | v61.59,20.95 61.59,10.37 HVBOX.3 | v76.2,20.95 76.2,14.61 88.9,14.61 88.9,17.14 104.14,17.14 v106.68,15.24
COOLING_SENSOR_1  (via drill 0.6)
  Top 0.406: 16_CHANNEL_MULTIPLEXER:MULTIPLEXER_3.12 35.56,99.7 v35.56,90.81 | v54.61,90.81 v54.61,51.44
  Bottom 0.406: v54.61,51.44 67.31,51.44 R3.P$1 R17.P$2
  Bottom 0.813: v35.56,90.81 v54.61,90.81
COOLING_SENSOR_2  (via drill 0.6)
  Top 0.406: v44.45,46.36 44.45,75.56 31.75,75.56 31.75,90.81 24.13,90.81 16_CHANNEL_MULTIPLEXER:MULTIPLEXER_3.1
  Bottom 0.406: R16.P$2 R9.P$1 62.23,42.55 62.23,46.36 v44.45,46.36
COOLING_SENSOR_3  (via drill 0.6)
  Top 0.406: v52.07,88.27 v52.07,48.89
  Bottom 0.406: v52.07,48.89 64.77,48.89 64.77,47.62 R14.P$1 R15.P$2 | 16_CHANNEL_MULTIPLEXER:MULTIPLEXER_3.5 34.29,88.27 v52.07,88.27
EVDC_ANALOG_1  (via drill 0.6)
  Top 0.406: v193.04,65.41 198.12,65.41 198.12,62.86 v200.66,62.86
  Bottom 0.406: PCB2.A3 v193.04,65.41 | v200.66,62.86 200.66,67.94 EXTRA_EVDC_ARDUINO_PINS.1
EVDC_ANALOG_2
  Bottom 0.406: PCB2.A4 195.58,62.86 195.58,72.39 200.02,72.39 EXTRA_EVDC_ARDUINO_PINS.2
EVDC_DIGITAL_1  (via drill 0.6)
  Top 0.406: v161.29,62.86 153.67,62.86 153.67,88.27 196.85,88.27 196.85,81.92 v205.74,81.92
  Bottom 0.406: PCB2.D6 v161.29,62.86 | v205.74,81.92 208.28,81.92 208.28,68.58 206.14,68.58 EXTRA_EVDC_ARDUINO_PINS.3
EVDC_DIGITAL_2  (via drill 0.6)
  Top 0.406: v161.29,65.41 156.21,65.41 156.21,85.73 193.68,85.73 193.68,78.74 v205.74,78.74
  Bottom 0.406: PCB2.D5 v161.29,65.41 | v205.74,78.74 205.74,72.8 EXTRA_EVDC_ARDUINO_PINS.4
FAN_CTRL  (via drill 0.6)
  Top 0.406: v110.49,55.25 97.79,55.25 97.79,75.56 v87.63,75.56
  Bottom 0.406: COOLING.5 107.31,10.37 107.95,10.16 110.49,10.16 v110.49,55.25 | v87.63,75.56 PCB1.D5
GND  (via drill 1.1)
  Top 1.422: 185.42,45.08 185.42,31.11 | 185.42,31.11 v180.34,31.11 | v36.83,127.76 29.21,127.76 29.21,114.3 R2.P$2 v23.5,107.31 | v86.36,95.25 v86.36,110.49 | v113.03,5.08 v118.11,5.08 | v189.23,111.76 v184.15,111.76 | 185.42,45.08 R7.P$1 R13.P$1 R8.P$1 | 185.42,45.08 v177.8,45.08 | v176.53,105.41 v154.94,105.41 148.59,105.41 v148.59,110.49 | v43.18,107.31 46.36,107.31 v46.36,94.62 46.36,80.65 v44.45,78.11 | v12.07,107.31 12.07,114.94 v9.53,116.84 | v170.81,27.3 170.81,22.23 v180.34,22.23 | v120.65,34.92 120.65,10.79 v118.11,10.79 | v72.39,35.56 45.09,35.56 45.09,43.81 41.91,43.81 16_CHANNEL_MULTIPLEXER:MULTIPLEXER_1.8 | 16_CHANNEL_MULTIPLEXER:MULTIPLEXER_1.15 26.67,51.44 v33.02,51.44 | 185.42,31.11 187.96,31.11 C13.1 | C5.1 C4.1 | MCP2515_2.9 151.13,20.95 154.94,20.95 v154.94,15.88 | v148.59,70.48 v148.59,75.56 | v209.55,98.42 v198.75,98.42 | v184.15,108.59 MCP2515_1.9 | v189.23,100.97 MCP2551_1.2 | v134.62,113.67 v118.11,113.67 | v86.36,125.09 72.39,125.09 72.39,122.56 61.59,122.56 61.59,127.76 v46.65,127.76 | v125.73,37.47 127,37.47 129.54,39.62 v132.08,39.62 | 16_CHANNEL_MULTIPLEXER:MULTIPLEXER_1.8 16_CHANNEL_MULTIPLEXER:MULTIPLEXER_1.7 16_CHANNEL_MULTIPLEXER:MULTIPLEXER_1.6 16_CHANNEL_MULTIPLEXER:MULTIPLEXER_1.5 16_CHANNEL_MULTIPLEXER:MULTIPLEXER_1.4 | 16_CHANNEL_MULTIPLEXER:MULTIPLEXER_1.1 16_CHANNEL_MULTIPLEXER:MULTIPLEXER_1.2 26.67,43.81 31.75,43.81 16_CHANNEL_MULTIPLEXER:MULTIPLEXER_1.4 | 16_CHANNEL_MULTIPLEXER:MULTIPLEXER_1.4 16_CHANNEL_MULTIPLEXER:MULTIPLEXER_1.8 | 16_CHANNEL_MULTIPLEXER:MULTIPLEXER_1.8 v41.91,51.44
  Bottom 1.422: v180.34,31.11 v180.34,22.23 180.34,4.87 | 180.34,4.87 DASHBOARD.10 | v36.83,127.76 v46.65,127.76 RELAYBRD.12 RELAYBRD.11 RELAYBRD.10 | PCB1.GND. 95.25,90.81 | 95.25,90.81 95.25,95.25 v86.36,95.25 | COOLING.10 107.46,5.08 v113.03,5.08 | MCP2551_1.2 v189.23,111.76 | R10.P$2 165.1,123.83 184.15,123.83 v184.15,111.76 v184.15,108.59 | 149.86,2.54 180.34,2.54 180.34,4.87 | 149.86,2.54 118.11,2.54 v118.11,5.08 v118.11,10.79 | 95.25,90.81 95.25,85.73 PCB1.GND | MCP2515_1.9 v176.53,105.41 | PCB2.GND. 182.88,80.65 182.88,85.73 187.96,85.73 187.96,98.42 C8.1 | v86.36,110.49 v86.36,125.09 98.42,125.09 | 98.42,125.09 12VDC/DC1.4 98.42,125.31 98.42,125.09 | v43.18,107.31 v23.5,107.31 v12.07,107.31 | v46.36,94.62 16_CHANNEL_MULTIPLEXER:MULTIPLEXER_3.8 16_CHANNEL_MULTIPLEXER:MULTIPLEXER_3.7 16_CHANNEL_MULTIPLEXER:MULTIPLEXER_3.6 | 5VDC/DC.5 5VDC/DC.6 9.53,125.31 v9.53,116.84 | MCP2551_2.2 v170.81,27.3 | C6.1 C7.1 118.11,47.62 118.11,34.92 v120.65,34.92 | v148.59,75.56 158.75,75.56 | PCB2.GND 158.75,75.56 | 158.75,75.56 158.75,98.42 154.94,98.42 v154.94,105.41 | R15.P$1 72.39,45.08 v72.39,35.56 | v33.02,51.44 16_CHANNEL_MULTIPLEXER:MULTIPLEXER_1.12 34.29,55.88 16_CHANNEL_MULTIPLEXER:MULTIPLEXER_2.6 | 16_CHANNEL_MULTIPLEXER:MULTIPLEXER_2.6 36.83,61.59 44.45,61.59 v44.45,78.11 | v154.94,15.88 C5.1 C4.1 149.86,2.54 | R18.P$2 138.43,51.44 138.43,41.28 | 138.43,41.28 146.05,41.28 146.05,51.44 148.59,51.44 v148.59,70.48 | 98.42,125.09 98.42,122.56 105.41,122.56 | 105.41,122.56 CHECK.P$1 | 12VDC/DC2.4 118.11,125.31 | 118.11,125.31 105.41,125.31 105.41,122.56 | v148.59,110.49 148.59,125.31 | 148.59,125.31 24VDC/DC.4 134.62,125.31 v134.62,113.67
  Bottom 1.422: 148.59,125.31 24VDC/DC.3 158.75,125.31 C12.1 | C11.1 209.55,124.46 C10.1 v209.55,98.42 | v198.75,98.42 C1.1 C2.1 C3.1 C8.1 | C8.1 C9.1 v189.23,100.97 | v118.11,113.67 118.11,125.31 | R16.P$1 R15.P$1 | R15.P$1 R17.P$1 | MCP2515_2.9 151.13,32.39 128.27,32.39 128.27,33.66 125.73,33.66 v125.73,37.47 | v132.08,39.62 133.35,41.28 138.43,41.28 | 16_CHANNEL_MULTIPLEXER:MULTIPLEXER_1.10 16_CHANNEL_MULTIPLEXER:MULTIPLEXER_1.9 | 16_CHANNEL_MULTIPLEXER:MULTIPLEXER_1.9 16_CHANNEL_MULTIPLEXER:MULTIPLEXER_2.8 16_CHANNEL_MULTIPLEXER:MULTIPLEXER_2.7 16_CHANNEL_MULTIPLEXER:MULTIPLEXER_2.6 | v41.91,51.44 16_CHANNEL_MULTIPLEXER:MULTIPLEXER_1.9
IMD_FAULT_LED  (via drill 0.6)
  Top 0.406: v165.56,13.95 165.74,42.55 158.75,42.55 158.75,48.89 v156.21,48.89
  Bottom 0.406: LED_CONTROL_3:PNP1.2 153.67,84.45 153.67,48.89 v156.21,48.89 | v165.56,13.95 165.56,4.84 DASHBOARD.8
IMD_FAULT_LED_CTRL
  Bottom 0.406: LED_CONTROL_3:R17.P$1 PCB1.D7
LED_CONTROL_1:N$24  (via drill 0.6)
  Top 0.406: LED_CONTROL_1:R17.P$2 151.13,59.06 151.13,66.67 v146.05,66.67
  Bottom 0.406: v146.05,66.67 LED_CONTROL_1:NPN1.1
LED_CONTROL_1:N$25
  Bottom 0.406: LED_CONTROL_1:NPN1.2 130.81,62.86 LED_CONTROL_1:R16.P$1 LED_CONTROL_1:R15.P$1
LED_CONTROL_1:N$27
  Bottom 0.406: LED_CONTROL_1:R16.P$2 138.43,64.14 LED_CONTROL_1:PNP1.1
LED_CONTROL_2:N$24  (via drill 0.6)
  Top 0.406: v64.77,78.11 v64.77,107.95 | v118.11,107.95 128.27,107.95 v128.27,103.51
  Bottom 0.406: LED_CONTROL_2:R17.P$2 64.77,67.94 v64.77,78.11 | v64.77,107.95 v118.11,107.95 | v128.27,103.51 LED_CONTROL_2:NPN1.1
LED_CONTROL_2:N$25
  Bottom 0.406: LED_CONTROL_2:NPN1.2 130.81,97.16 LED_CONTROL_2:R16.P$1 LED_CONTROL_2:R15.P$1
LED_CONTROL_2:N$27
  Bottom 0.406: LED_CONTROL_2:R16.P$2 138.43,98.42 LED_CONTROL_2:PNP1.1
LED_CONTROL_3:N$24  (via drill 0.6)
  Top 0.406: v67.31,78.11 v67.31,105.41 | v115.57,92.71 v128.27,92.71
  Bottom 0.406: LED_CONTROL_3:R17.P$2 67.31,70.48 v67.31,78.11 | v67.31,105.41 115.57,105.41 v115.57,92.71 | v128.27,92.71 LED_CONTROL_3:NPN1.1
LED_CONTROL_3:N$25
  Bottom 0.406: LED_CONTROL_3:NPN1.2 130.81,85.73 LED_CONTROL_3:R16.P$1 LED_CONTROL_3:R15.P$1
LED_CONTROL_3:N$27
  Bottom 0.406: LED_CONTROL_3:R16.P$2 138.43,87 LED_CONTROL_3:PNP1.1
LED_CONTROL_4:N$24  (via drill 0.6)
  Top 0.406: v69.85,78.11 v69.85,102.87 | v113.03,83.19 113.03,81.28 v128.27,81.28
  Bottom 0.406: LED_CONTROL_4:R17.P$2 v69.85,78.11 | v69.85,102.87 113.03,102.87 v113.03,83.19 | v128.27,81.28 LED_CONTROL_4:NPN1.1
LED_CONTROL_4:N$25
  Bottom 0.406: LED_CONTROL_4:NPN1.2 130.81,74.3 LED_CONTROL_4:R16.P$1 LED_CONTROL_4:R15.P$1
LED_CONTROL_4:N$27
  Bottom 0.406: LED_CONTROL_4:R16.P$2 138.43,75.56 LED_CONTROL_4:PNP1.1
MCP2515-MISO_1
  Bottom 0.406: MCP2515_1.15 165.1,113.67 165.1,85.73 170.18,85.73 170.18,47.62 PCB2.D12
MCP2515-MISO_2  (via drill 0.6)
  Top 0.406: v87.63,57.78 87.63,48.26 115.57,48.26 115.57,53.97 135.89,53.97 135.89,41.28 MCP2515_2.15
  Bottom 0.406: PCB1.D12 v87.63,57.78
MCP2515-MOSI_1  (via drill 0.6)
  Top 0.406: v172.72,50.17 PCB2.D11
  Bottom 0.406: MCP2515_1.14 167.64,113.67 167.64,88.27 172.72,88.27 v172.72,50.17
  other vias: 165.1,50.17
MCP2515-MOSI_2  (via drill 0.6)
  Top 0.406: v90.17,60.33 90.17,50.17 113.03,50.17 113.03,55.88 138.43,55.88 138.43,41.28 MCP2515_2.14
  Bottom 0.406: PCB1.D11 v90.17,60.33
MCP2515-SCK_1
  Bottom 0.406: MCP2515_1.13 170.18,113.67 179.07,113.67 179.07,90.81 175.26,88.27 175.26,47.62 PCB2.D13
MCP2515-SCK_2  (via drill 0.6)
  Top 0.406: MCP2515_2.13 140.97,41.28 140.97,57.78 v102.87,57.78
  Bottom 0.406: v102.87,57.78 PCB1.D13
MCP2515-SS_1
  Bottom 0.406: MCP2515_1.16 162.56,113.67 162.56,83.19 167.64,83.19 167.64,52.7 PCB2.D10
MCP2515-SS_2  (via drill 0.6)
  Top 0.406: v92.71,62.86 v92.71,52.7 | v102.87,43.18 130.81,43.18 130.81,41.28 133.35,41.28 MCP2515_2.16
  Bottom 0.406: PCB1.D10 v92.71,62.86 | v92.71,52.7 102.87,52.7 v102.87,43.18
N$1  (via drill 0.6)
  Top 0.406: v105.41,97.79 v100.33,97.79 | v19.69,97.79 v19.69,51.44
  Bottom 0.406: v19.69,97.79 v100.33,97.79 | v105.41,97.79 105.41,83.19 PCB1.A0 | v19.69,51.44 29.21,51.44 16_CHANNEL_MULTIPLEXER:MULTIPLEXER_1.3
N$2  (via drill 0.6)
  Top 0.406: v86.36,12.06 86.36,19.69 90.81,19.69 v90.81,43.81
  Bottom 0.406: R3.P$2 80.01,52.7 80.01,50.17 90.81,50.17 v90.81,43.81 | v86.36,12.06 86.36,7.62 94.86,7.62 COOLING.7
N$3
  Bottom 0.406: COOLING.8 99.06,2.54 73.66,2.54 73.66,33.66 79.38,33.66 79.38,42.55 R9.P$2
N$4  (via drill 0.6, 0.6 pad 0.25)
  Top 0.406: v85.09,45.72 100.97,45.72 100.97,12.7 113.03,12.7 v113.03,9.53
  Bottom 0.406: v85.09,45.72 80.01,45.72 80.01,47.62 R14.P$2 | v113.03,9.53 113.03,7.62 103.26,7.62 COOLING.9
N$5  (via drill 0.6)
  Top 0.406: MCP2515_2.1 130.81,34.92 158.75,34.92 v158.75,29.84
  Bottom 0.406: v158.75,29.84 MCP2551_2.1
N$6  (via drill 0.6)
  Top 0.406: MCP2515_2.2 133.35,32.39 v156.21,32.39
  Bottom 0.406: v156.21,32.39 174.62,32.39 MCP2551_2.4
N$7  (via drill 0.6)
  Top 0.406: MCP2515_2.8 148.59,17.78 152.4,17.78 152.4,8.25 v146.05,8.25
  Bottom 0.406: v146.05,8.25 146.05,10.79 CRYSTAL2.2 C4.2
N$8
  Bottom 0.406: 16_CHANNEL_MULTIPLEXER:MULTIPLEXER_1.11 36.83,50.17 44.45,50.17 44.45,55.25 105.41,55.25 105.41,70.48 PCB1.A5
N$9  (via drill 0.6)
  Top 0.406: v36.83,85.73 38.1,88.27 38.1,99.7 16_CHANNEL_MULTIPLEXER:MULTIPLEXER_3.11
  Bottom 0.406: 16_CHANNEL_MULTIPLEXER:MULTIPLEXER_2.11 v36.83,85.73 52.07,85.73 52.07,64.14 63.5,64.14 64.77,65.41 PCB1.D9
N$10  (via drill 0.6)
  Top 0.406: v173.99,93.34 v184.79,93.34
  Bottom 0.406: MCP2515_1.8 v173.99,93.34 CRYSTAL1.2 | v184.79,93.34 C8.2
N$12  (via drill 0.6)
  Top 0.406: v186.69,113.67 v156.21,113.67
  Bottom 0.406: MCP2551_1.1 v186.69,113.67 | v156.21,113.67 MCP2515_1.1
N$13  (via drill 0.6)
  Top 0.406: v184.79,103.51 v158.75,103.51
  Bottom 0.406: MCP2551_1.4 194.31,103.51 v184.79,103.51 | v158.75,103.51 MCP2515_1.2
N$14
  Bottom 0.406: C11.2 R12.P$2
N$15  (via drill 0.6)
  Top 0.406: C9.2 v171.45,100.97
  Bottom 0.406: MCP2515_1.7 v171.45,100.97 CRYSTAL1.1
N$16
  Bottom 0.406: MCP2551_1.8 186.69,125.09 175.26,125.09 R10.P$1
N$17
  Bottom 0.406: R11.P$2 C10.2
N$19  (via drill 0.6)
  Top 0.406: v107.95,75.56 v107.95,83.19 | v107.95,97.79 v107.95,110.49
  Bottom 0.406: OKHS_CHECK.P$1 95.25,118.75 CHECK.P$2 95.25,110.49 v107.95,110.49 | PCB1.A3 v107.95,75.56 | v107.95,83.19 v107.95,97.79
N$20  (via drill 0.6)
  Top 0.406: v153.67,37.47 153.67,51.44 R18.P$1
  Bottom 0.406: MCP2551_2.8 v153.67,37.47
N$21  (via drill 0.6)
  Top 0.406: MCP2515_2.7 v146.05,17.78
  Bottom 0.406: v146.05,17.78 146.05,15.88 CRYSTAL2.1 C5.2
N$22  (via drill 0.6)
  Top 0.406: R20.P$2 123.19,48.89 123.19,52.07 v117.47,52.07
  Bottom 0.406: v117.47,52.07 C7.2
N$23  (via drill 0.6)
  Top 0.406: R19.P$2 123.19,46.36 123.19,45.08 v120.65,45.08
  Bottom 0.406: v120.65,45.08 C6.2
N$24  (via drill 0.6)
  Top 0.406: v41.91,80.65 43.36,83.21 43.36,99.72 16_CHANNEL_MULTIPLEXER:MULTIPLEXER_3.9 | v92.71,83.19 92.71,113.67 v90.17,113.67 | v90.17,123.19 77.47,123.19 77.47,78.11 73.66,78.11 v73.66,59.06
  Bottom 0.406: 16_CHANNEL_MULTIPLEXER:MULTIPLEXER_2.9 v41.91,80.65 46.99,80.65 46.99,59.06 v73.66,59.06 | PCB1.A6 92.71,67.94 v92.71,83.19 | v90.17,113.67 v90.17,123.19
N$25  (via drill 0.6)
  Top 0.406: v39.37,83.19 40.64,85.73 40.64,99.7 16_CHANNEL_MULTIPLEXER:MULTIPLEXER_3.10 | v90.17,83.19 v90.17,110.49 | v88.27,121.28 80.01,121.28 80.01,75.56 76.2,75.56 v76.2,61.59
  Bottom 0.406: 16_CHANNEL_MULTIPLEXER:MULTIPLEXER_2.10 v39.37,83.19 49.53,83.19 49.53,61.59 v76.2,61.59 | PCB1.A7 90.17,65.41 v90.17,83.19 | v90.17,110.49 88.27,110.49 v88.27,121.28
OKHS_IN  (via drill 0.6)
  Top 0.406: v75.56,127 v81.28,127 | OKHS_CHECK.P$2 82.55,118.75 v82.55,40 | v81.28,19.69 v81.28,9.53 | v70.48,5.08 v81.28,5.08
  Bottom 0.406: RELAYBRD.1 67.65,122.56 75.56,122.56 v75.56,127 | v81.28,127 83.82,127 OKHS_CHECK.P$2 | v82.55,40 81.28,40 v81.28,19.69 | HVBOX.7 61.59,4.87 61.59,5.08 v70.48,5.08 | v81.28,5.08 v81.28,9.53
PUMP_CTRL  (via drill 0.6)
  Top 0.406: v83.82,19.69 v83.82,12.06 | v105.41,52.7 95.25,52.7 95.25,73.03 v87.63,73.03
  Bottom 0.406: v105.41,52.7 105.41,34.92 83.82,34.92 v83.82,19.69 | v83.82,12.06 83.82,5.08 90.66,5.08 COOLING.6 | v87.63,73.03 PCB1.D6
PWM_HIGH  (via drill 0.6)
  Top 0.406: v4.45,85.73 v4.45,7.62
  Bottom 0.406: HVBOX.6 56.52,6.14 55.24,7.62 v4.45,7.62 | v4.45,85.73 31.75,85.73 16_CHANNEL_MULTIPLEXER:MULTIPLEXER_3.4
PWM_LOW
  Bottom 0.406: HVBOX.5 1.91,4.87 1.91,88.27 25.4,88.27 26.67,90.81 16_CHANNEL_MULTIPLEXER:MULTIPLEXER_3.2
READY_DRIVE_CTRL  (via drill 0.6)
  Top 0.406: v53.34,119.38 53.34,114.3 54.61,114.3 v54.61,93.34
  Bottom 0.406: RELAYBRD.4 55.05,119.38 v53.34,119.38 | v54.61,93.34 59.69,93.34 59.69,90.81 PCB1.RX1
READY_SOUND  (via drill 0.6)
  Top 0.406: v49.53,23.5 v78.74,23.5 | v107.95,17.14 118.11,17.14 v118.11,31.11 | v163.45,27.3 v163.45,13.97 | v49.53,37.47 49.53,109.86 44.45,109.86 v44.45,119.38
  Bottom 0.406: RELAYBRD.6 46.65,119.38 v44.45,119.38 | v78.74,23.5 78.74,17.14 86.36,17.14 86.36,19.69 107.95,19.69 v107.95,17.14 | v163.45,13.97 DASHBOARD.2 | v118.11,31.11 125.73,31.11 125.73,27.3 v163.45,27.3 | v49.53,37.47 v49.53,23.5
RELAYBRD_THERMISTOR  (via drill 0.6)
  Top 0.406: v36.83,122.56 16_CHANNEL_MULTIPLEXER:MULTIPLEXER_3.14
  Bottom 0.406: v36.83,122.56 63.5,122.56 63.5,125.31 RELAYBRD.8
SOFTWARE_DC/DC_CTRL  (via drill 0.6)
  Top 0.406: v48.9,119.38 v48.9,112.4 | v62.23,106.05 v62.23,93.34
  Bottom 0.406: RELAYBRD.5 50.85,119.38 v48.9,119.38 | v48.9,112.4 52.07,112.4 52.07,106.05 v62.23,106.05 | PCB1.TX1 v62.23,93.34
SOFTWARE_PUSHBUTTON_CTRL  (via drill 0.6)
  Top 0.406: v65.41,119.38 65.41,116.84 74.93,116.84 v74.93,80.65
  Bottom 0.406: RELAYBRD.2 63.45,119.38 v65.41,119.38 | v74.93,80.65 PCB1.D3
SOFTWARE_SHUTDOWN_CTRL  (via drill 0.6)
  Top 0.406: v61.59,119.38 61.59,114.3 72.39,114.3 v72.39,83.19
  Bottom 0.406: RELAYBRD.3 59.25,119.38 v61.59,119.38 | v72.39,83.19 PCB1.D2
START_LED  (via drill 0.6)
  Top 0.406: v156.21,46.36 156.21,40 161.29,40 v161.34,13.97
  Bottom 0.406: LED_CONTROL_4:PNP1.2 151.13,73.03 151.13,46.36 v156.21,46.36 | v161.34,13.97 161.34,4.87 DASHBOARD.7
START_LED_CTRL
  Bottom 0.406: LED_CONTROL_4:R17.P$1 80.01,78.11 PCB1.D4
VCC_AIR_DIVIDER  (via drill 0.6)
  Top 0.406: v31.75,124.46 R1.P$2 | v38.1,119.38 16_CHANNEL_MULTIPLEXER:MULTIPLEXER_3.13
  Bottom 0.406: R2.P$1 v31.75,124.46 31.75,119.38 v38.1,119.38
VCCAIR  (via drill 1.1)
  Top 1.422: v57.15,114.3 v57.15,125.09 | v59.69,43.81 v59.69,109.22
  Bottom 0.406: v57.15,125.09 57.15,125.31
  Bottom 1.422: R1.P$1 v57.15,114.3 59.69,114.3 v59.69,109.22 | 57.15,125.31 RELAYBRD.9 | HVBOX.4 66.04,10.79 66.04,31.11 62.23,31.11 62.23,40 59.69,40 v59.69,43.81